# Altium PCB CAN_Node_PCB.PcbDoc
Units mm, origin at the board's own origin, x right, y up, seen from the top; angles counter-clockwise.
Board outline 25 x 49 mm, 4 copper layers (Top Side, Ground Plane, Power Plane, Bottom Side), stack 0.844 mm thick; 48 components, 33 nets, 185 pads, 39 vias.
Unrouted connection lines stored in the file: 1.
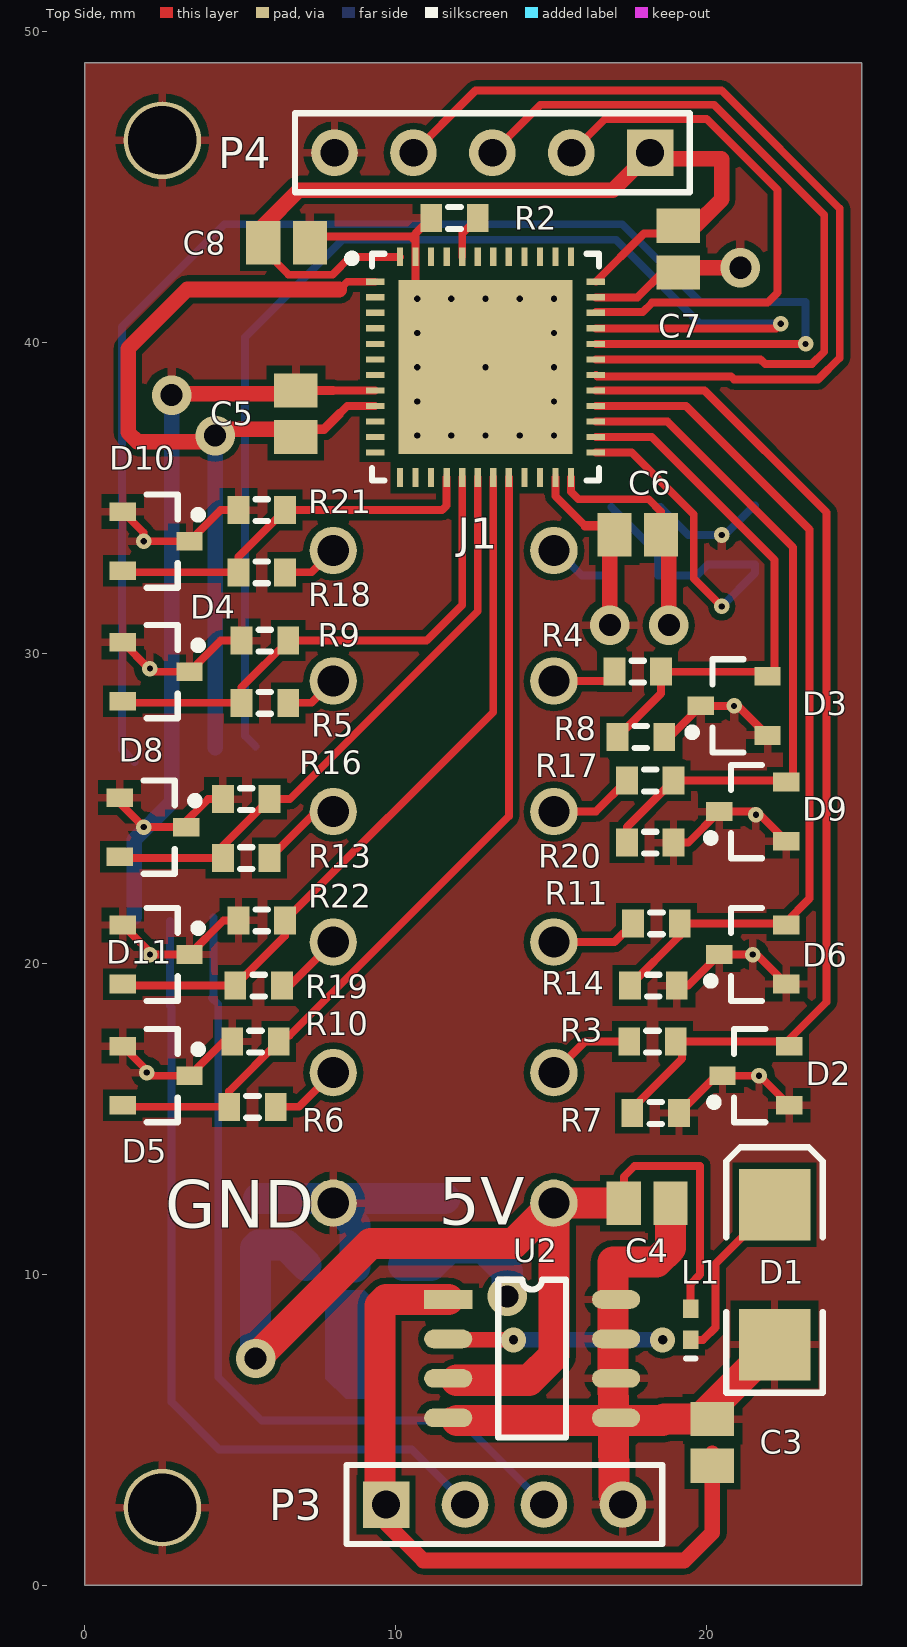
[diagram p0: Top Side view]
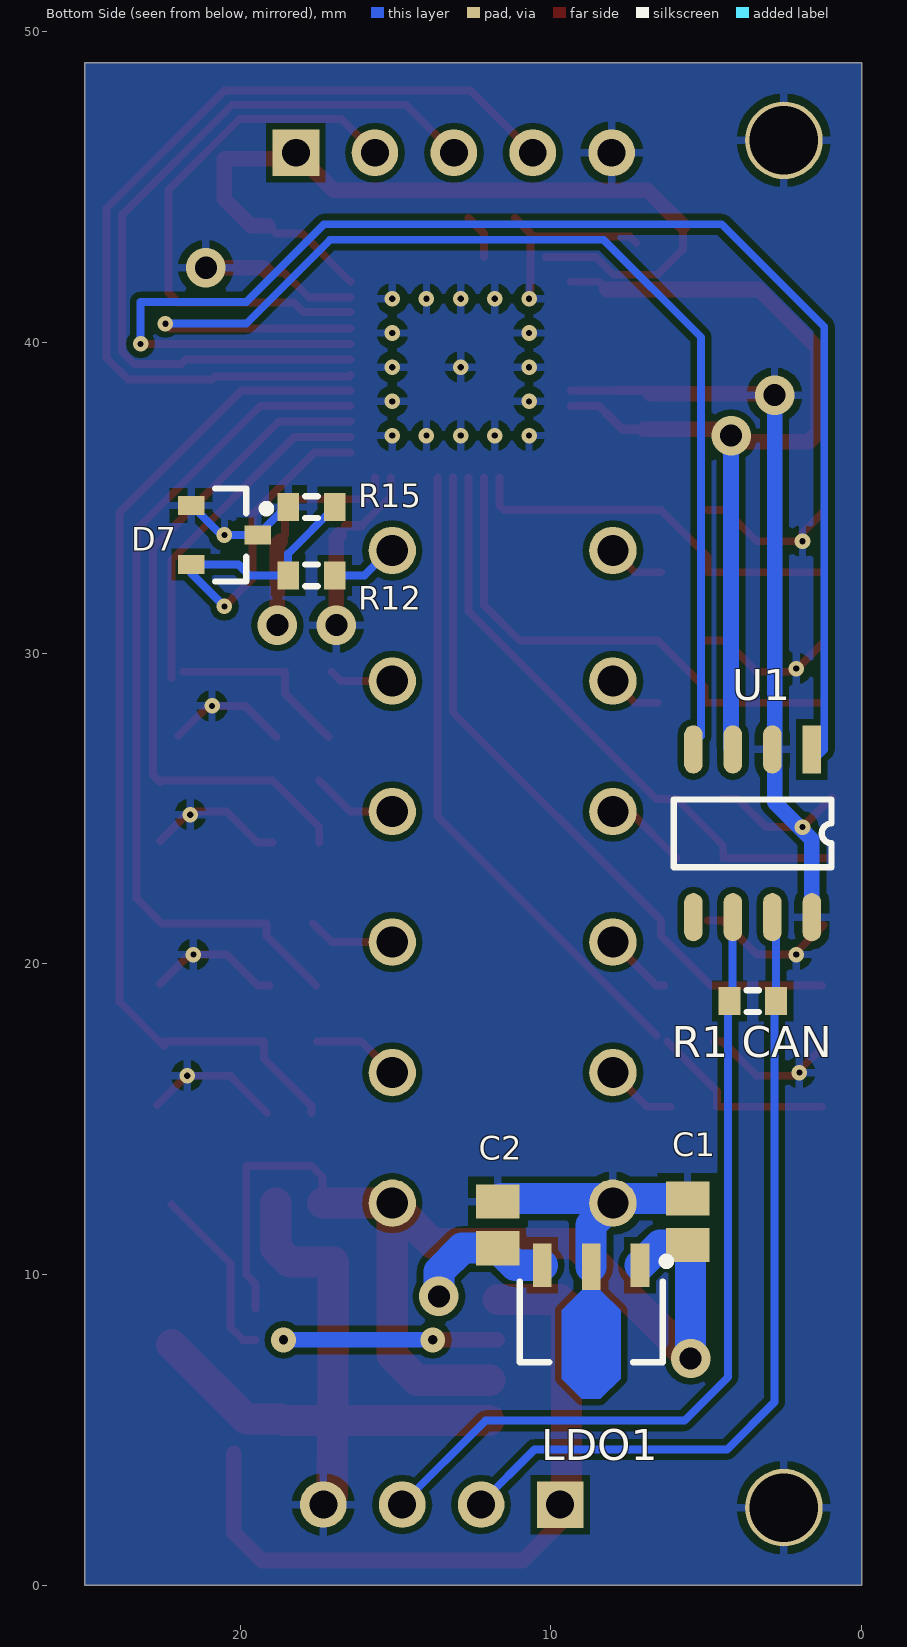
[diagram p1: Bottom Side view, seen from below]
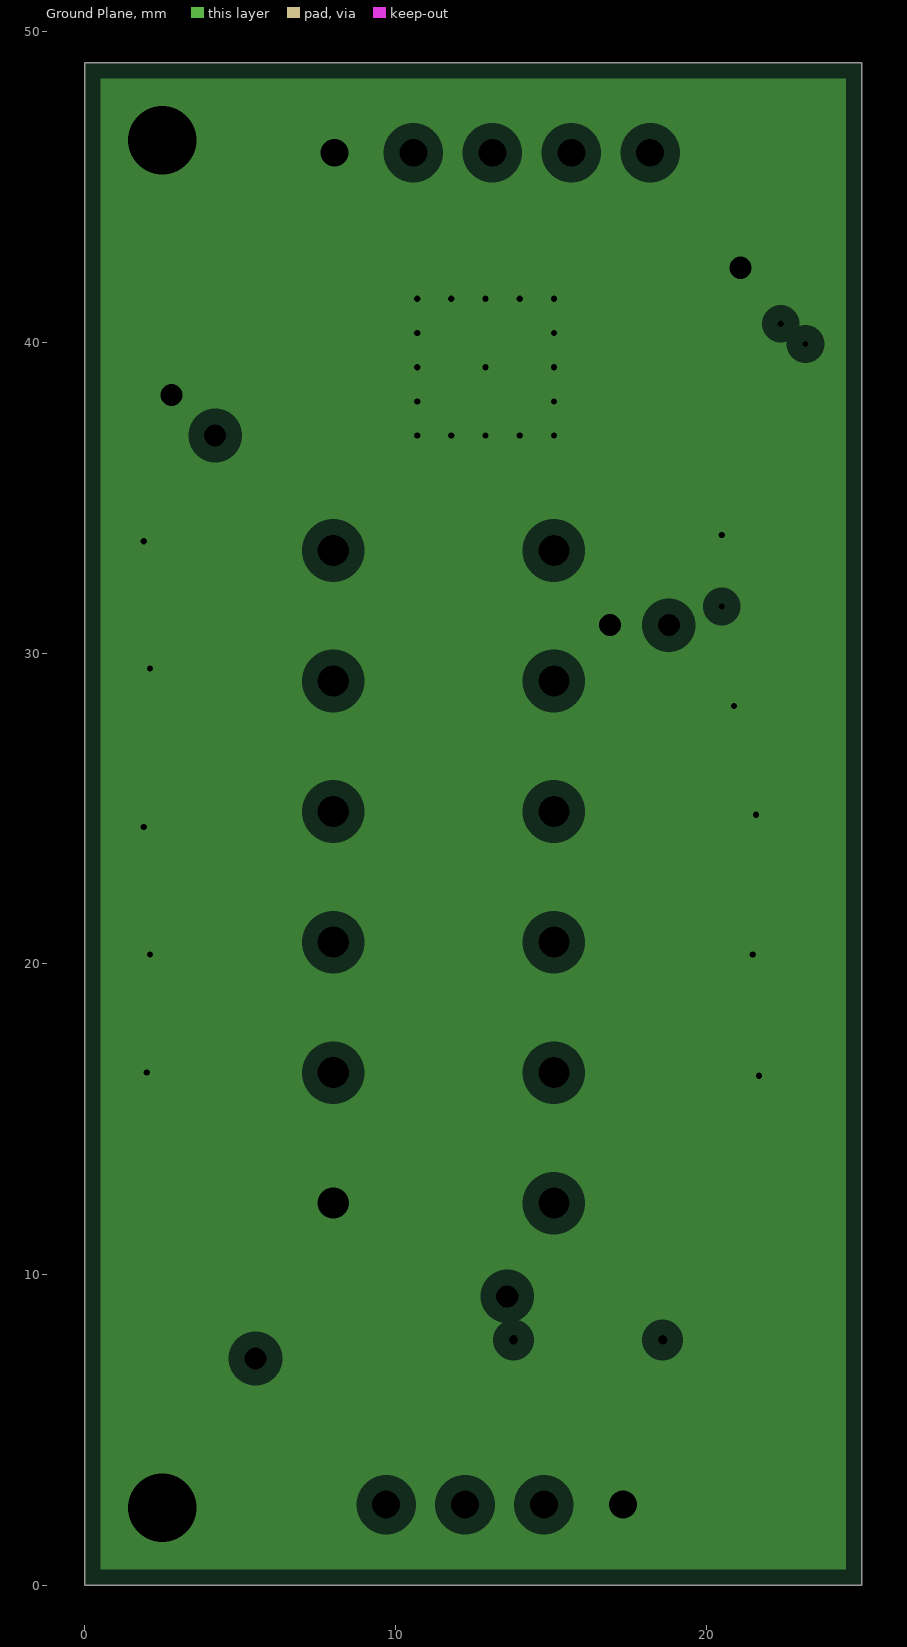
[diagram p2: Ground Plane, clearances drawn from the general rule]
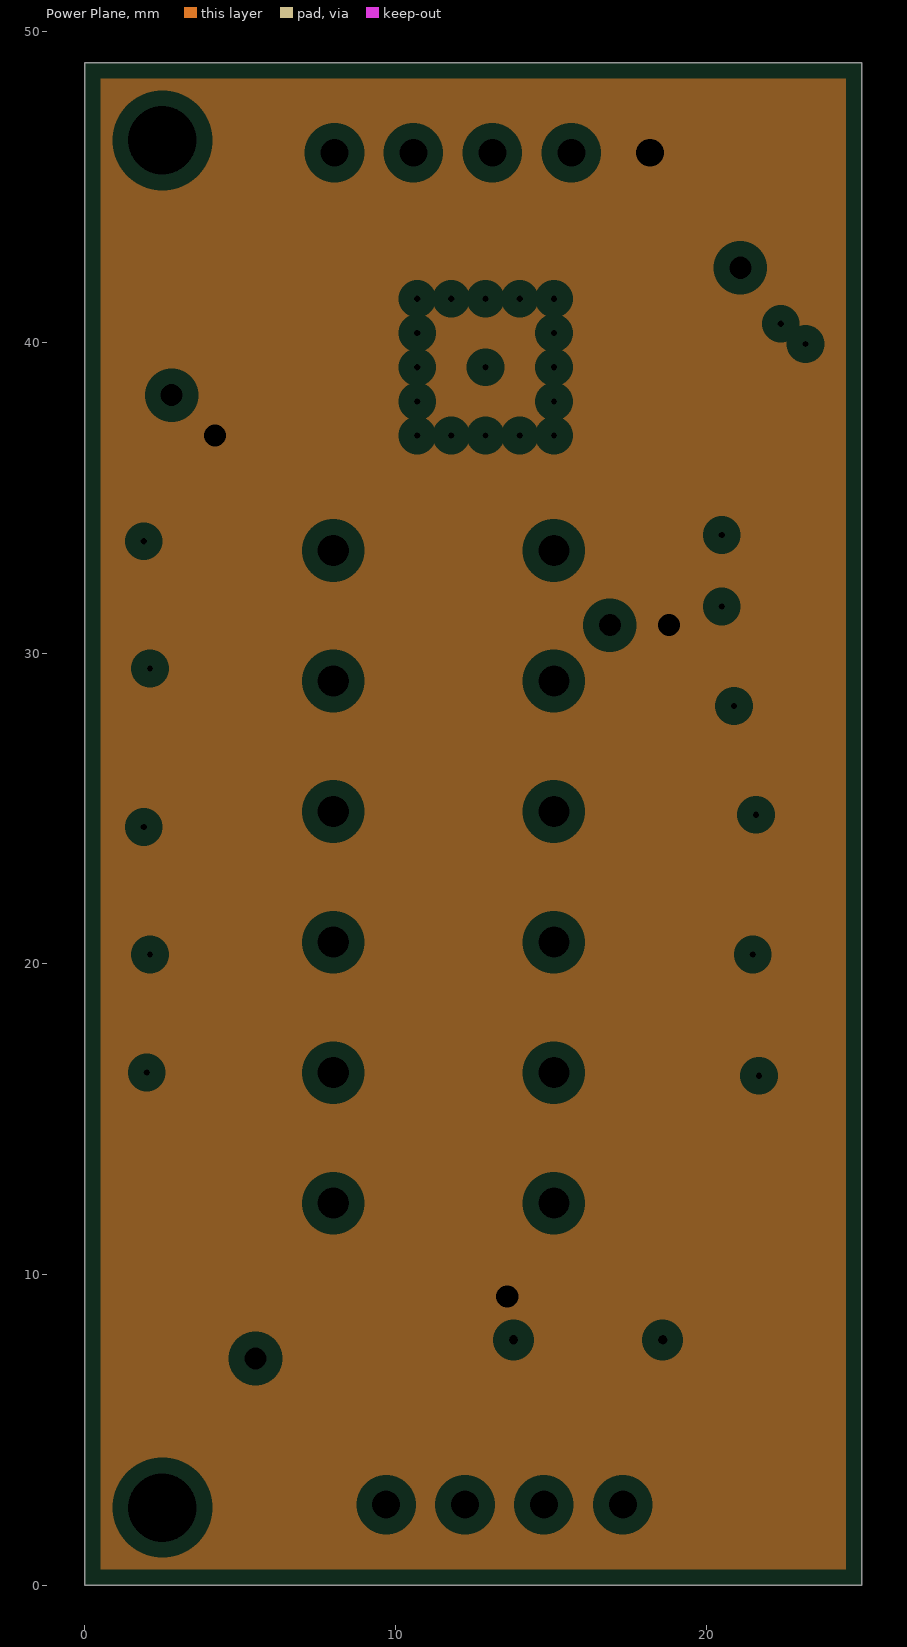
[diagram p3: Power Plane, clearances drawn from the general rule]

## Layer stack, top to bottom
Top Solder: solder mask 0.0102, Solder Resist, Dk 3.5
Top Side: signal copper 0.0356
Dielectric 1: core 0.32, FR-4, Dk 4.8
Ground Plane: plane copper 0.036, net GND
Dielectric 3: prepreg 0.127, Dk 4.2
Power Plane: plane copper 0.036, net VCC_3V3
Dielectric 4: core 0.254, Dk 4.2
Bottom Side: signal copper 0.0356
Bottom Solder: solder mask 0.0102, Solder Resist, Dk 3.5

## Board outline
0,49 0,0 25,0 25,49

## Design rules (kind name [scope] priority, off if disabled: settings)
AssemblyTestPointUsage [All] p1: valid=2
Clearance [All] p1: gap=0.2
FabricationTestPointUsage [All] p1: valid=2 allowmultiple=FALSE
HoleSize [All] p1: absolutevalues=TRUE maxlimit=55 minlimit=0.025 maxpercent=80.000 minpercent=20.000
MinimumSolderMaskSliver [All] p1: minsoldermaskwidth=0
PlaneClearance [All] p1: clearance=0.508
PlaneConnect [All] p1: planeconnectstyle=Relief reliefexpansion=0.508 reliefentries=4 reliefconductorwidth=0.254 reliefairgap=0.254
PolygonConnect [All] p1: connectstyle=Relief reliefconductorwidth=0.254 reliefentries=4 polygonreliefangle="90 Angle" airgapwidth=0.254
RoutingVias [All] p1: holewidth=0.711 width=1.27 viastyle="Through Hole" minholewidth=0.2 minwidth=0.5 maxholewidth=0.711 maxwidth=1.27
SolderMaskExpansion [All] p1: expansion=0.102
Width [All] p1: maxlimit=1000 minlimit=0.254 preferedwidth=0.254
24 further rules are at their usual default settings.

## Classes and differential pairs
component class "Input Dividers": D2 D3 D4 D5 D6 D7 D8 D9 D10 D11 R3 R4 R5 R6 R7 R8 R9 R10 R11 R12 R13 R14 R15 R16 R17 R18 R19 R20 R21 R22
component class CAN_Node: .4 C1 C2 C3 C4 C5 C6 C7 C8 D1 J1 L1 LDO1 P3 P4 "R1 CAN" R2 U1 U2

## Components (designator, comment, footprint, x,y, rotation, side; value= is the part's Value field where it differs from the comment)
C1 "Cap Pol3" C0805 5.6,11.7 r90 bottom
C2 "Cap Pol3" C0805 11.7,11.6 r90 bottom
C3 "Cap Pol3" C0805 20.2,4.6 r90 top
C4 "Cap Pol3" C0805 18.1,12.3 r0 top
C5 "Cap Pol3" C0805 6.8,37.7 r90 top
C6 "Cap Pol3" C0805 17.8,33.8 r180 top
C7 "Cap Pol3" C0805 19.1,43 r270 top
C8 "Cap Pol3" C0805 6.5,43.2 r0 top
D1 "D Schottky" SMB 22.2,10 r90 top
D2 "SZBZX84C3V6ET1G" BZX84CxxxET1G 21.6,16.4 r180 top
D3 "SZBZX84C3V6ET1G" BZX84CxxxET1G 20.9,28.3 r180 top
D4 "SZBZX84C3V6ET1G" BZX84CxxxET1G 2.3,29.4 r0 top
D5 "SZBZX84C3V6ET1G" BZX84CxxxET1G 2.3,16.4 r0 top
D6 "SZBZX84C3V6ET1G" BZX84CxxxET1G 21.5,20.3 r180 top
D7 "SZBZX84C3V6ET1G" BZX84CxxxET1G 20.5,33.8 r180 bottom
D8 "SZBZX84C3V6ET1G" BZX84CxxxET1G 2.2,24.4 r0 top
D9 "SZBZX84C3V6ET1G" BZX84CxxxET1G 21.5,24.9 r180 top
D10 "SZBZX84C3V6ET1G" BZX84CxxxET1G 2.3,33.6 r0 top
D11 "SZBZX84C3V6ET1G" BZX84CxxxET1G 2.3,20.3 r0 top
J1 "STM32F072CBU6" STM32F072CBU6 12.9,39.2 r0 top
L1 "Inductor" 0402-A 19.5,8.4 r90 top
LDO1 "LDK220U33R" SOT89-157P409X160-3N 8.7,8.5 r270 bottom
P3 "Header 4" HDR1X4 9.7,2.6 r0 top
P4 "Header 5" HDR1X5 18.2,46.1 r180 top
"R1 CAN" "Res3" J1-0603 3.5,18.8 r180 bottom (schematic designator R1)
R2 "Res3" J1-0603 11.9,44 r180 top
R3 "Res3" J1-0603 18.275,17.5 r180 top
R4 "Res3" J1-0603 17.8,29.4 r180 top
R5 "Res3" J1-0603 5.8,28.4 r0 top
R6 "Res3" J1-0603 5.4,15.4 r0 top
R7 "Res3" J1-0603 18.375,15.2 r180 top
R8 "Res3" J1-0603 17.9,27.3 r180 top
R9 "Res3" J1-0603 5.8,30.4 r0 top
R10 "Res3" J1-0603 5.5,17.5 r0 top
R11 "Res3" J1-0603 18.4,21.3 r180 top
R12 "Res3" J1-0603 17.7,32.5 r180 bottom
R13 "Res3" J1-0603 5.2,23.4 r0 top
R14 "Res3" J1-0603 18.3,19.3 r180 top
R15 "Res3" J1-0603 17.7,34.7 r180 bottom
R16 "Res3" J1-0603 5.2,25.3 r0 top
R17 "Res3" J1-0603 18.2,25.9 r180 top
R18 "Res3" J1-0603 5.7,32.6 r0 top
R19 "Res3" J1-0603 5.6,19.3 r0 top
R20 "Res3" J1-0603 18.2,23.9 r180 top
R21 "Res3" J1-0603 5.7,34.6 r0 top
R22 "Res3" J1-0603 5.7,21.4 r0 top
U1 "CAN TRANCEIVER" SOP8 1.6,26.9 r270 bottom
U2 "DC/DC CONVERTER" SOP8 11.7,9.2 r0 top

## Footprints (in the part's own frame and the unit in brackets; to place one, negate y for a bottom-side part, rotate by r counter-clockwise, add the part's x,y. Pads: shape width x height; smd on the part's side, far side on the other; paste and mask are expansions set on the pad)
0402-A [mm] "Chip Inductor, Body 1.0x0.5mm, IPC High Density"
  rect 0.6x0.5 smd: 1(-0.5,0) 2(0.5,0)
  silkscreen extent -1.1,-0.15 -1.1,0.15, body extent -0.55,-0.3 0.55,0.3, height 0.55
BZX84CxxxET1G [mm] "SOT23, 3-Leads, Body 2.9x1.3mm, Pitch 0.95mm, Lead Span 2.3mm - Reverse Pinning, IPC High Density"
  rect 0.85x0.6 smd: 1(-1.075,0.95) 2(1.075,0) 3(-1.075,-0.95)
  silkscreen extent -0.3,-1.5 1.47,1.5, body extent -0.7,-1.5 0.7,1.5, height 1.1
C0805 [mm] "Chip Capacitor, Body 2.0x1.3mm, IPC High Density"
  rect 1.1x1.4 smd: 1(-0.75,0) 2(0.75,0)
  body extent -1.1,-0.72 1.1,0.72, height 1.4
HDR1X4 [mm] "Connector; Header; 4 Position"
  rect 1.5x1.5 hole 0.9: 1(0,0)
  round 1.5 hole 0.9: 2(2.54,0) 3(5.08,0) 4(7.62,0)
  silkscreen extent -1.27,-1.27 8.89,1.27
HDR1X5 [mm] "Connector; Header; 5 Position"
  rect 1.5x1.5 hole 0.9: 1(0,0)
  round 1.5 hole 0.9: 2(2.54,0) 3(5.08,0) 4(7.62,0) 5(10.16,0)
  silkscreen extent -1.27,-1.27 11.43,1.27
J1-0603 [mm] "Chip Resistor, Body 1.6x0.8mm, IPC High Density"
  rect 0.7x0.9 smd: 1(-0.75,0) 2(0.75,0)
  silkscreen extent -0.2,-0.35 0.2,0.35, body extent -0.85,-0.48 0.85,0.48, height 0.9
SMB [mm] "DO-214-AA/SMB; 2 C-Bend Leads; Body 5.3 x 3.6 mm, inc. leads (LxW)"
  rect 2.3x2.3 smd: 1(-2.25,0) 2(2.25,0)
  silkscreen extent -3.8,-1.55 4.1,1.55
SOP8 [mm]
  rect 1.55x0.6 smd: 1(0,0)
  oval 1.55x0.6 smd: 2(0,-1.27) 3(0,-2.54) 4(0,-3.81) 5(5.4,-3.81) 6(5.4,-2.54) 7(5.4,-1.27) 8(5.4,0)
  silkscreen extent 1.61,-4.45 3.79,0.63, body extent -0.4,-4.35 5.6,0.55, height 1.62
SOT89-157P409X160-3N [mm] "SOT89, 3-Leads, Body 4.50x2.45mm, Pitch 1.57mm, Lead Span 4.1mm, IPC Medium Density"
  rect 1.4x0.6 smd: 1(-1.8,1.57) 3(-1.8,-1.57)
  rect 1.5x0.6 smd: 2(-1.75,0)
  Top Side region: -1,0.3 -0.35,0.95 1.85,0.95 2.5,0.3 2.5,-0.3 1.85,-0.95 -0.35,-0.95 -1,-0.3
  silkscreen extent -2.05,-2.3 1.32,2.54, body extent -1.28,-2.3 1.32,2.3, height 1.6
STM32F072CBU6 [mm] "STMicroelectronics STM32F072CBU6, 32bit ARM Cortex M0 Microcontroller, 48MHz, 64 kB, 128 kB Flash, 48-Pin UFQFPN"
  rect 0.6x0.2 smd: 1(-3.55,2.75) 2(-3.55,2.25) 3(-3.55,1.75) 4(-3.55,1.25) 5(-3.55,0.75) 6(-3.55,0.25) 7(-3.55,-0.25) 8(-3.55,-0.75) 9(-3.55,-1.25) 10(-3.55,-1.75) 11(-3.55,-2.25) 12(-3.55,-2.75) 25(3.55,-2.75) 26(3.55,-2.25) 27(3.55,-1.75) 28(3.55,-1.25) 29(3.55,-0.75) 30(3.55,-0.25) 31(3.55,0.25) 32(3.55,0.75) 33(3.55,1.25) 34(3.55,1.75) 35(3.55,2.25) 36(3.55,2.75)
  rect 0.2x0.6 smd: 13(-2.75,-3.55) 14(-2.25,-3.55) 15(-1.75,-3.55) 16(-1.25,-3.55) 17(-0.75,-3.55) 18(-0.25,-3.55) 19(0.25,-3.55) 20(0.75,-3.55) 21(1.25,-3.55) 22(1.75,-3.55) 23(2.25,-3.55) 24(2.75,-3.55) 37(2.75,3.55) 38(2.25,3.55) 39(1.75,3.55) 40(1.25,3.55) 41(0.75,3.55) 42(0.25,3.55) 43(-0.25,3.55) 44(-0.75,3.55) 45(-1.25,3.55) 46(-1.75,3.55) 47(-2.25,3.55) 48(-2.75,3.55)
  rect 5.6x5.6 smd: 49(0,0)
  silkscreen extent -4.42,-3.65 3.65,3.65, body extent -3.5,-3.5 3.5,3.5, height 0.55

## Part data
C1 C2 C3 C4 C5 C6 C7 C8: "Polarized Capacitor (Surface Mount)"
D1: "Schottky Diode"
J1: "MICROCONTROLLER"
LDO1: "3.3V LDO"
P3: "Header, 4-Pin"
P4: "Header, 5-Pin"
"R1 CAN" R2 R3 R4 R5 R6 R7 R8 R9 R10 R11 R12 R13 R14 R15 R16 R17 R18 R19 R20 R21 R22: "Resistor"
U1: library part 595-SN65HVD233
U2: library part AP1509-50SG-13

## Free pads (board coordinates)
  round 1.524 hole 1: 2(8,12.3) 2(8,16.5) 2(8,20.7) 2(8,24.9) 2(8,29.1) 2(8,33.3) 2(15.1,12.3) 2(15.1,16.5) 2(15.1,20.7) 2(15.1,24.9) 2(15.1,29.1) 2(15.1,33.3)
  round 2.5 hole 2.2: 3(2.5,2.5) 3(2.5,46.5)

## Via types
v1: diameter 0.5, hole 0.2, Top Side to Bottom Side, 30 vias
v2: diameter 1.27, hole 0.711, Top Side to Bottom Side, 7 vias
v3: diameter 0.8, hole 0.3, Top Side to Bottom Side, 2 vias

## Nets (pads, with @x,y where several pads share a name; then routed paths per layer and width w, separated by ;. In a path a pad name is that pad's centre, name@x,y a point inside that pad or via, vN(x,y) a via of type N, cw(c..) or ccw(c..) an arc to the next point about the centre after c; other vN are vias at no path point)
"CAN H": "R1 CAN.2" P3.2 U1.7 | length 26.3
  Bottom Side w0.254: U1.7@2.75,21.38 2.75,18.65 2.8,18.6 2.8,5.9 4.325,4.375 10.525,4.375 P3.2@12.27,2.63
"CAN L": "R1 CAN.1" P3.3 U1.6 | length 27.4
  Bottom Side w0.254: 4.1,18.9 4.3,18.7 4.3,6.7 5.7,5.3 12.1,5.3 14.76,2.64 P3.3@15.14,2.64 ; 4.15,18.9 U1.6@4.15,21.49
"CAN RX": J1.33 U1.4 | length 39
  Top Side w0.254: J1.33 22.25,40.45 v1(22.4,40.6)
  Bottom Side w0.254: U1.4@5.5,27 5.162,27.338 5.162,40.162 8.3,43.3 17.1,43.3 19.8,40.6 v1(22.4,40.6)
"CAN TX": J1.32 U1.1 | length 46.7
  Top Side w0.254: J1.32 v1(23.2,39.95)
  Bottom Side w0.254: U1.1@1.6,26.5 1.2,26.9 1.2,40.5 4.5,43.8 17.3,43.8 19.8,41.3 23.2,41.3 v1(23.2,39.95)
GND: C1.2 C2.2 C3.2 C4.2 C5.2 C6.2 C7.2 C8.2 D1.1 D2.1 D2.2 D3.1 D3.2 D4.1 D4.2 D5.1 D5.2 D6.1 D6.2 D7.1 D7.2 D8.1 D8.2 D9.1 D9.2 D10.1 D10.2 D11.1 D11.2 J1.8 J1.23 J1.35 J1.47 J1.49 LDO1.2 P3.4 P4.5 pad.2@8,12.3 pad.3 R2.2 R7.1 R8.1 R9.1 R10.1 R14.1 R15.1 R16.1 R20.1 R21.1 R22.1 U1.2 U1.8 U2.4 U2.5 U2.6 U2.7 U2.8 | length 115.1
  Top Side w0.254: D8.1@0.95,25.35 v1(1.9,24.4) 3.075,24.4 3.975,25.3 R16.1 ; D5.1 2,16.575 v1(2,16.5) ; D11.1 2.1,20.375 v1(2.1,20.3) D11.2 4.475,21.4 R22.1 ; D4.1 2.075,29.5 v1(2.1,29.5) ; D10.1 1.9,33.875 v1(1.9,33.6) D10.2 4.375,34.6 R21.1 ; v1@2.1,16.4 D5.2 4.475,17.5 R10.1 ; v1@2.2,29.4 D4.2 4.375,30.4 R9.1 ; C8.2 7.45,43.4 10.5,43.4 ; 7.996,38.45 J1.8 ; 10.525,43.375 10.65,43.25 ; J1.49@10.65,41.45 J1.47 10.65,43.25 ; R2.2 10.65,43.5 10.65,43.25 ; U2.4@11.7,5.59 U2.4@11.99,5.3 ; J1.23 15.15,35.05 16.1,34.1 ; J1.35@16.45,41.446 17.788,41.446 18.592,42.25 C7.2 ; U2.5@17.014,5.3 U2.5@17.017,5.3 ; R8.1@18.825,27.3 D3.2 v1(20.9,28.3) 21.025,28.3 D3.1 ; R20.1 19.425,23.9 D9.2 21.625,24.9 D9.1 ; R14.1 19.425,19.3 D6.2 v1(21.5,20.3) 21.625,20.3 D6.1 ; R7.1 D2.2@20.3,16.375 ; D2.2@20.3,16.4 D2.2 v1(21.7,16.4) 21.725,16.4 D2.1
  Top Side w0.3: C5.2 7.996,38.45 ; 16.1,34.1 C6.2@16.6,34.1
  Top Side w0.5: v2@2.8,38.35 C5.2@6.8,38.35 ; C6.2@16.8,33.8 16.9,33.7 v2(16.9,30.9) ; C7.2 19.25,42.4 v2(21.1,42.4)
  Top Side w1: U2.4@11.99,5.3 U2.5@17.014,5.3 ; U2.5@17.015,5.59 17.009,6.659 17.008,6.859 17,8.129 17,8.2 17,10.4 18.4,10.4 18.85,10.85 C4.2 ; P3.4 17.031,2.885 17.017,5.3 18.6,5.3 18.65,5.35 19.8,5.35 D1.1
  Bottom Side w0.254: R15.1 18.525,34.7 D7.2 v1(20.5,33.8) 20.6,33.8 21.55,34.75 D7.1 ; v1(21.5,20.3) v1@21.525,20.3
  Bottom Side w0.5: U1.8 1.6,24 2.8,25.2 v2(2.8,38.3)
  Bottom Side w1: C1.2 C2.2@11.6,12.45 ; pad.2@8,12.3 8.7,11.6 LDO1.2
  other v1: 21.6,24.8 10.7,37 11.8,37 12.9,37 14,37 15.1,37 10.7,38.1 15.1,38.1 10.7,39.2 12.9,39.2 15.1,39.2 10.7,40.3 15.1,40.3 10.7,41.4 11.8,41.4 12.9,41.4 14,41.4 15.1,41.4
NetD1_2: D1.2 L1.1 U2.2 | length 12.6
  Top Side w0.254: L1.1 19.9,7.9 20.3,8.3 20.3,10.35 D1.2
  Top Side w0.5: U2.2@11.73,7.9 v3(13.8,7.9)
  Bottom Side w0.5: v3(13.8,7.9) v3(18.6,7.9)
NetD2_3: D2.3 J1.29 R3.1 R7.2 | length 33
  Top Side w0.254: J1.29 19.95,38.45 23.877,34.523 23.877,18.777 D2.3@22.45,17.35 ; R7.2@17.7,15.2 17.7,15.425 19.225,16.95 19.225,17.5 D2.3@22.45,17.5
NetD3_3: D3.3 J1.26 R4.1 R8.2 | length 17.1
  Top Side w0.254: J1.26 18.25,36.95 22.2,33 D3.3@22.2,29.2 ; R8.2 18.55,28.7 R4.1 D3.3@21.825,29.4
NetD4_3: D4.3 J1.17 R5.1 R9.2 | length 16.6
  Top Side w0.254: D4.3@1.275,28.4 R5.1 5.05,28.9 R9.2 11,30.4 12.15,31.55 J1.17
NetD5_3: D5.3 J1.20 R6.1 R10.2 | length 27
  Top Side w0.254: D5.3@1.275,15.4 R6.1 4.65,15.9 R10.2 ; R10.2@6.6,17.7 13.65,24.75 J1.20
NetD6_3: D6.3 J1.28 R11.1 R14.2 | length 27.6
  Top Side w0.254: J1.28 19.35,37.95 23.327,33.973 23.327,22.102 22.525,21.3 R11.1 19.15,20.9 R14.2
NetD7_3: D7.3 J1.25 R12.1 R15.2 | length 15.2
  Top Side w0.254: J1.25 17.606,36.45 ; 17.606,36.456 19.6,34.462 19.6,32.4 v1(20.5,31.5)
  Bottom Side w0.254: R15.2 18.45,33.2 R12.1 19.7,32.5 20.05,32.85 D7.3 21.575,32.575 v1(20.5,31.5)
NetD8_3: D8.3 J1.18 R13.1 R16.2 | length 19.5
  Top Side w0.254: D8.3@0.975,23.4 R13.1 4.45,23.8 R16.2 6.6,25.3 12.65,31.35 J1.18
NetD9_3: D9.3 J1.27 R17.1 R20.2 | length 21.9
  Top Side w0.254: J1.27 18.75,37.45 22.8,33.4 22.8,26.075 D9.3 ; R20.2 17.45,24.4 R17.1 D9.3@22.525,25.9
NetD10_3: D10.3 J1.16 R18.1 R21.2 | length 12.5
  Top Side w0.254: D10.3@1.275,32.6 R18.1 4.95,33.1 R21.2 11.5,34.6 11.65,34.75 J1.16
NetD11_3: D11.3 J1.19 R19.1 R22.2 | length 23.4
  Top Side w0.254: D11.3@1.275,19.3 R19.1 6.45,20.9 R22.2 13.15,28.1 J1.19
NetJ1_44: J1.44 R2.1 | length 1.5
  Top Side w0.254: J1.44 12.15,43.5 R2.1
NetP1_2: pad.2@15.1,16.5 R3.2 | length 2.8
  Top Side w0.254: pad.2@15.1,16.5 16.1,17.5 R3.2
NetP1_3: pad.2@15.1,20.7 R11.2 | length 2.8
  Top Side w0.254: pad.2@15.1,20.7 17.05,20.7 R11.2
NetP1_4: pad.2@15.1,24.9 R17.2 | length 2.8
  Top Side w0.254: pad.2@15.1,24.9 16.45,24.9 R17.2
NetP1_5: pad.2@15.1,29.1 R4.2 | length 2.1
  Top Side w0.254: pad.2@15.1,29.1 16.75,29.1 R4.2
NetP1_6: pad.2@15.1,33.3 R12.2 | length 2.2
  Bottom Side w0.254: pad.2@15.1,33.3 15.2,33.3 16,32.5 R12.2
NetP2_2: pad.2@8,16.5 R6.2 | length 2.3
  Top Side w0.254: R6.2 6.9,15.4 pad.2@8,16.5
NetP2_3: pad.2@8,20.7 R19.2 | length 2.2
  Top Side w0.254: R19.2 6.6,19.3 pad.2@8,20.7
NetP2_4: pad.2@8,24.9 R13.2 | length 2.7
  Top Side w0.254: R13.2 7.45,24.9 pad.2@8,24.9
NetP2_5: pad.2@8,29.1 R5.2 | length 1.7
  Top Side w0.254: R5.2 7.3,28.4 pad.2@8,29.1
NetP2_6: pad.2@8,33.3 R18.2 | length 1.8
  Top Side w0.254: R18.2 7.3,32.6 pad.2@8,33.3
NRST: J1.34 P4.2 | length 17.7
  Top Side w0.254: P4.2@15.46,45.9 16.752,47.192 20.008,47.192 22.3,44.9 22.3,41.6 21.977,41.277 18.261,41.277 17.959,40.975 J1.34@16.45,40.975
SWCLK: J1.30 P4.4 | length 29.4
  Top Side w0.254: P4.4@10.38,45.9 12.58,48.1 20.5,48.1 24.3,44.3 24.3,39.5 23.6,38.8 20.9,38.8 20.796,38.904 16.496,38.904 J1.30
SWDIO: J1.31 P4.3 | length 25
  Top Side w0.254: P4.3@12.92,45.9 14.666,47.646 20.254,47.646 23.8,44.1 23.8,39.7 23.4,39.3 21.9,39.3 21.75,39.45 J1.31
"V BATT": C3.1 P3.1 U2.1 | length 23.3
  Top Side w0.254: P3.1@9.7,2 P3.1
  Top Side w0.5: P3.1@9.7,2 10.9,0.8 19.3,0.8 20.2,1.7 C3.1@20.2,4.25
  Top Side w1: P3.1 9.5,2.8 9.5,9 9.7,9.2 U2.1
VCC_3V3: C2.1 C5.1 C6.1 C7.1 C8.1 J1.1 J1.9 J1.24 J1.36 J1.48 LDO1.3 P4.1 U1.3 | length 70.4
  Top Side w0.254: C8.1@5.75,43.75 C8.1 5.75,42.988 6.565,42.173 7.973,42.173 8.55,42.75 J1.48 ; 8.2,37.7 8.45,37.95 J1.9 ; 8.2,41.7 8.45,41.95 J1.1 ; J1.24 15.65,35.192 15.892,34.95 18.15,34.95 18.55,34.55 C6.1 ; J1.36 18,43.5 18.85,43.5 C7.1
  Top Side w0.3: 6,37.2 7.7,37.2 8.2,37.7
  Top Side w0.5: C8.1@5.75,43.75 6.9,44.9 17,44.9 P4.1@18,45.9 ; C5.1@7,37.2 6,37.2 4.6,37.2 4.2,36.8 1.7,36.8 1.4,37.1 1.4,39.8 3.3,41.7 8.2,41.7 ; P4.1@18.4,46.1 18.6,45.9 20.484,45.9 20.5,45.884 20.5,44.6 19.65,43.75 C7.1 ; C6.1@18.7,33.6 18.8,33.5 v2(18.8,30.9)
  Bottom Side w0.5: U1.3@4.2,26.96 v2(4.2,37)
  Bottom Side w1: LDO1.3 11.15,10.3 C2.1 12.85,10.85 13.6,10.1 v2(13.6,9.3)
VCC_5V: C1.1 C4.1 L1.2 LDO1.1 pad.2@15.1,12.3 U2.3 | length 35.8
  Top Side w0.254: C4.1 17.35,13.15 17.7,13.5 19.8,13.5 19.8,10 19.5,9.7 L1.2
  Top Side w1: v2(5.5,7.3) 9.2,11 13.8,11 pad.2@15.1,12.3 ; U2.3@11.96,6.6 14.3,6.6 15.1,7.4 pad.2@15.1,12.3 ; C4.1 pad.2@15.1,12.3
  Bottom Side w1: v2(5.5,7.3) C1.1@5.5,10.85 ; C1.1 6.48,10.95 LDO1.1
pads on no net: J1.2 J1.3 J1.4 J1.5 J1.6 J1.7 J1.10 J1.11 J1.12 J1.13 J1.14 J1.15 J1.21 J1.22 J1.37 J1.38 J1.39 J1.40 J1.41 J1.42 J1.43 J1.45 J1.46 U1.5

## Polygon pours and split planes (outlines as drawn)
GND on Bottom Side "GND_L04_P004" (solid, remove dead copper, pour order 4): 0,49 0,0 25,0 25,49
GND on Top Side "GND_L01_P006" (solid, remove dead copper, pour order 6): 0,49 0,0 25,0 25,49
GND on Ground Plane (split plane): 24.49,48.49 24.49,0.51 0.51,0.51 0.51,48.49
VCC_3V3 on Power Plane (split plane): 24.49,48.49 24.49,0.51 0.51,0.51 0.51,48.49

## Silkscreen, mask and mechanical layers (free items; w line width, h text height)
Top Overlay:
  text "5V" at 11.4,11.6 h1.52
  text "GND" at 2.6,11.5 h1.52